# Altium PCB Target Control System Front Panel.PcbDoc
Units mm, origin at the board's own origin, x right, y up, seen from the top; angles counter-clockwise.
Board outline 254 x 161.7 mm, 2 copper layers (Top Layer, Bottom Layer), stack 1.569 mm thick; 8 components, 108 nets, 8 pads, 0 vias.
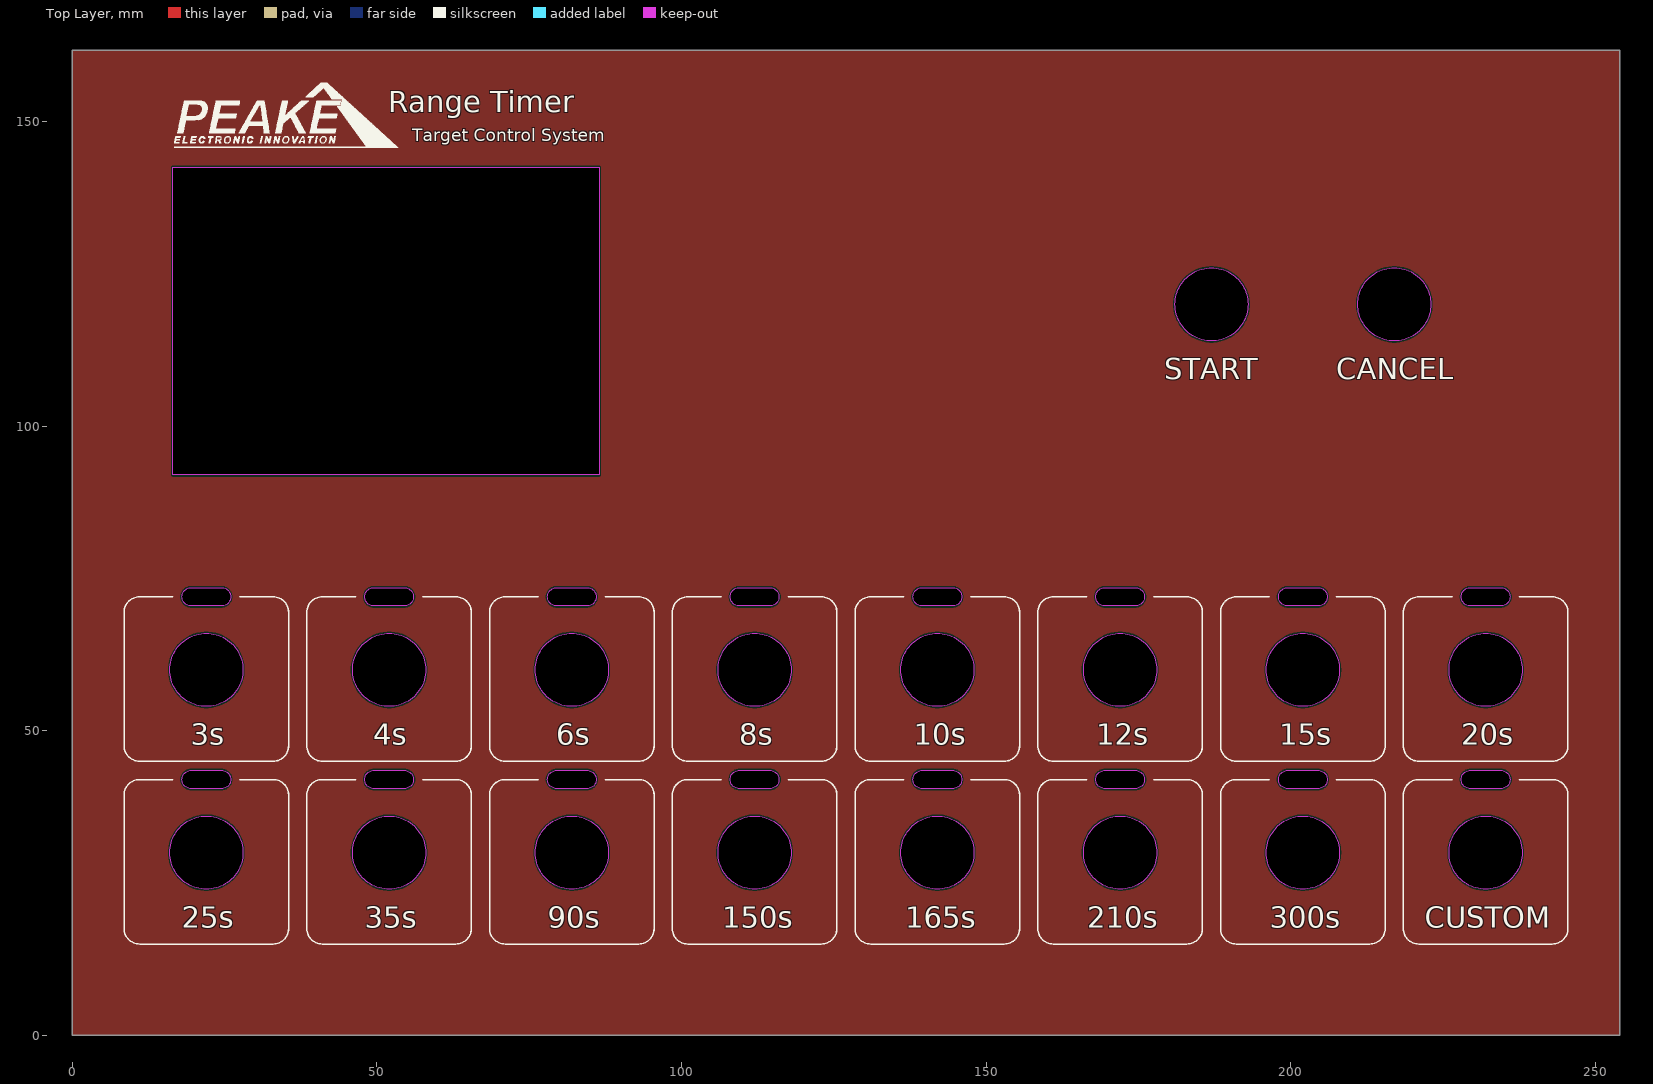
[diagram p0: Top Layer view]
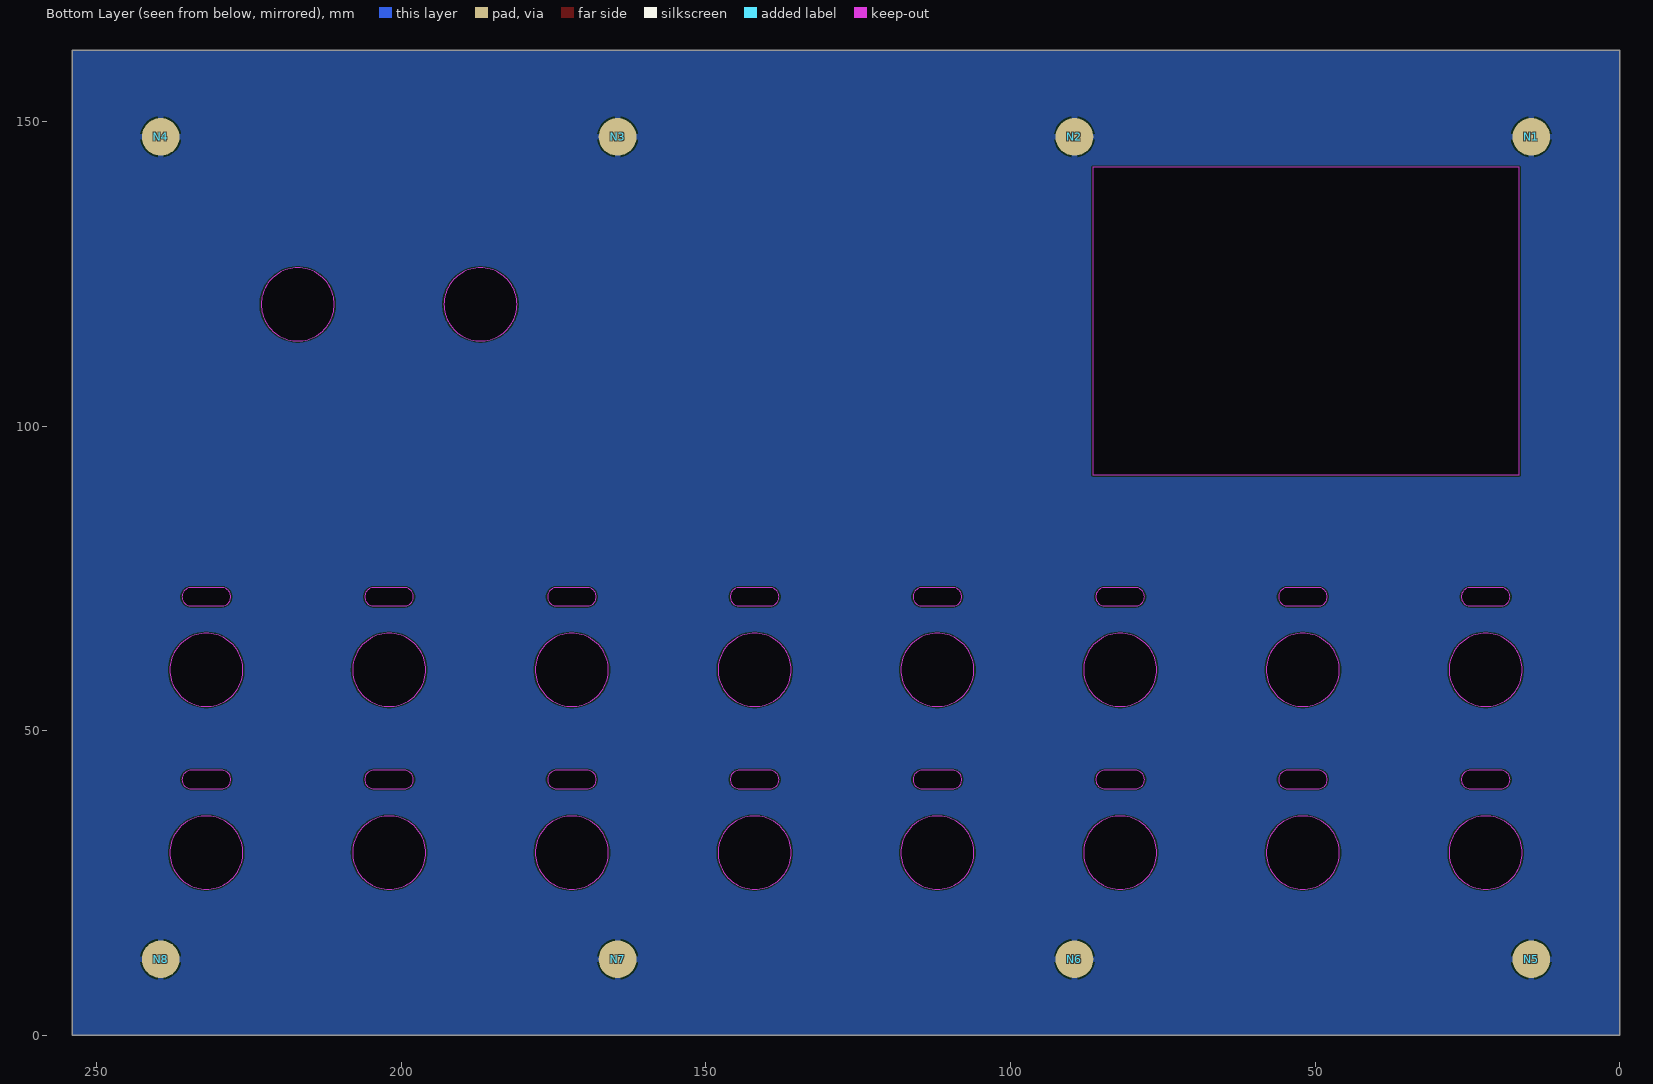
[diagram p1: Bottom Layer view, seen from below]

## Layer stack, top to bottom
Top Solder: solder mask 0.0254, SM-001, Dk 4
Top Layer: signal copper 0.035
Dielectric 1: core 1.4986, Core-043, Dk 4.3
Bottom Layer: signal copper 0.035
Bottom Solder: solder mask 0.0254, SM-001, Dk 4

## Board outline
0.006,0.006 254.006,0.006 254.006,161.706 0.006,161.706
cut-out: 211,120 cw(c217,120) 217,126 cw(c217,120) 223,120 cw(c217,120) 217,114 cw(c217,120)
cut-out: 181,120 cw(c187,120) 187,126 cw(c187,120) 193,120 cw(c187,120) 187,114 cw(c187,120)
cut-out: 196,30 cw(c202,30) 202,36 cw(c202,30) 208,30 cw(c202,30) 202,24 cw(c202,30)
cut-out: 199.5,40.5 cw(c199.5,42) 198,42 cw(c199.5,42) 199.5,43.5 204.5,43.5 cw(c204.5,42) 206,42 cw(c204.5,42) 204.5,40.5
cut-out: 199.5,70.5 cw(c199.5,72) 198,72 cw(c199.5,72) 199.5,73.5 204.5,73.5 cw(c204.5,72) 206,72 cw(c204.5,72) 204.5,70.5
cut-out: 196,60 cw(c202,60) 202,66 cw(c202,60) 208,60 cw(c202,60) 202,54 cw(c202,60)
cut-out: 229.5,40.5 cw(c229.5,42) 228,42 cw(c229.5,42) 229.5,43.5 234.5,43.5 cw(c234.5,42) 236,42 cw(c234.5,42) 234.5,40.5
cut-out: 226,30 cw(c232,30) 232,36 cw(c232,30) 238,30 cw(c232,30) 232,24 cw(c232,30)
cut-out: 229.5,70.5 cw(c229.5,72) 228,72 cw(c229.5,72) 229.5,73.5 234.5,73.5 cw(c234.5,72) 236,72 cw(c234.5,72) 234.5,70.5
cut-out: 226,60 cw(c232,60) 232,66 cw(c232,60) 238,60 cw(c232,60) 232,54 cw(c232,60)
cut-out: 136,30 cw(c142,30) 142,36 cw(c142,30) 148,30 cw(c142,30) 142,24 cw(c142,30)
cut-out: 139.5,40.5 cw(c139.5,42) 138,42 cw(c139.5,42) 139.5,43.5 144.5,43.5 cw(c144.5,42) 146,42 cw(c144.5,42) 144.5,40.5
cut-out: 139.5,70.5 cw(c139.5,72) 138,72 cw(c139.5,72) 139.5,73.5 144.5,73.5 cw(c144.5,72) 146,72 cw(c144.5,72) 144.5,70.5
cut-out: 136,60 cw(c142,60) 142,66 cw(c142,60) 148,60 cw(c142,60) 142,54 cw(c142,60)
cut-out: 169.5,40.5 cw(c169.5,42) 168,42 cw(c169.5,42) 169.5,43.5 174.5,43.5 cw(c174.5,42) 176,42 cw(c174.5,42) 174.5,40.5
cut-out: 166,30 cw(c172,30) 172,36 cw(c172,30) 178,30 cw(c172,30) 172,24 cw(c172,30)
cut-out: 169.5,70.5 cw(c169.5,72) 168,72 cw(c169.5,72) 169.5,73.5 174.5,73.5 cw(c174.5,72) 176,72 cw(c174.5,72) 174.5,70.5
cut-out: 166,60 cw(c172,60) 172,66 cw(c172,60) 178,60 cw(c172,60) 172,54 cw(c172,60)
cut-out: 76,30 cw(c82,30) 82,36 cw(c82,30) 88,30 cw(c82,30) 82,24 cw(c82,30)
cut-out: 79.5,40.5 cw(c79.5,42) 78,42 cw(c79.5,42) 79.5,43.5 84.5,43.5 cw(c84.5,42) 86,42 cw(c84.5,42) 84.5,40.5
cut-out: 79.5,70.5 cw(c79.5,72) 78,72 cw(c79.5,72) 79.5,73.5 84.5,73.5 cw(c84.5,72) 86,72 cw(c84.5,72) 84.5,70.5
cut-out: 76,60 cw(c82,60) 82,66 cw(c82,60) 88,60 cw(c82,60) 82,54 cw(c82,60)
cut-out: 109.5,40.5 cw(c109.5,42) 108,42 cw(c109.5,42) 109.5,43.5 114.5,43.5 cw(c114.5,42) 116,42 cw(c114.5,42) 114.5,40.5
cut-out: 106,30 cw(c112,30) 112,36 cw(c112,30) 118,30 cw(c112,30) 112,24 cw(c112,30)
cut-out: 109.5,70.5 cw(c109.5,72) 108,72 cw(c109.5,72) 109.5,73.5 114.5,73.5 cw(c114.5,72) 116,72 cw(c114.5,72) 114.5,70.5
cut-out: 106,60 cw(c112,60) 112,66 cw(c112,60) 118,60 cw(c112,60) 112,54 cw(c112,60)
cut-out: 46,60 cw(c52,60) 52,66 cw(c52,60) 58,60 cw(c52,60) 52,54 cw(c52,60)
cut-out: 49.5,70.5 cw(c49.5,72) 48,72 cw(c49.5,72) 49.5,73.5 54.5,73.5 cw(c54.5,72) 56,72 cw(c54.5,72) 54.5,70.5
cut-out: 46,30 cw(c52,30) 52,36 cw(c52,30) 58,30 cw(c52,30) 52,24 cw(c52,30)
cut-out: 49.5,40.5 cw(c49.5,42) 48,42 cw(c49.5,42) 49.5,43.5 54.5,43.5 cw(c54.5,42) 56,42 cw(c54.5,42) 54.5,40.5
cut-out: 16,60 cw(c22,60) 22,66 cw(c22,60) 28,60 cw(c22,60) 22,54 cw(c22,60)
cut-out: 19.5,70.5 cw(c19.5,72) 18,72 cw(c19.5,72) 19.5,73.5 24.5,73.5 cw(c24.5,72) 26,72 cw(c24.5,72) 24.5,70.5
cut-out: 19.5,40.5 cw(c19.5,42) 18,42 cw(c19.5,42) 19.5,43.5 24.5,43.5 cw(c24.5,42) 26,42 cw(c24.5,42) 24.5,40.5
cut-out: 16,30 cw(c22,30) 22,36 cw(c22,30) 28,30 cw(c22,30) 22,24 cw(c22,30)
cut-out: 16.5,142.5 86.5,142.5 86.5,92 16.5,92

## Design rules (kind name [scope] priority, off if disabled: settings)
AssemblyTestPointUsage AssemblyTestPointUsage_1 [All] p2:
AssemblyTestpoint AssemblyTestpoint_1 [All] p2: testpointundercomponent=TRUE minsize=1.016 maxsize=2.54 preferedsize=1.524 minholesize=0 maxholesize=1.016 preferedholesize=0.813 testpointgrid=0.025 usegrid=TRUE gridtolerance=0 allowsidetop=TRUE allowsidebottom=TRUE
Clearance [All] p1: gap=0.254 ignorepadtopadclearanceinfootprint=FALSE except(0: Arc-Hole Track-Hole SMDPad-Hole THPad-Hole Via-Hole Fill-Hole Poly-Hole Region-Hole Text-Hole)
Clearance Clearance_1 [All] p2: gap=0.254 ignorepadtopadclearanceinfootprint=FALSE except(0: Arc-Hole Track-Hole SMDPad-Hole THPad-Hole Via-Hole Fill-Hole Poly-Hole Region-Hole Text-Hole)
ComponentClearance ComponentClearance_1 [All] p2: gap=0.254 collisioncheckmode=3 verticalgap=0.254 showdistances=FALSE
DiffPairsRouting [All] p1: maxlimit=0.254 minlimit=0.254 mostfreqgap=0.254 toplayer_minwidth=0.381 toplayer_maxwidth=0.381 toplayer_prefwidth=0.381 bottomlayer_minwidth=0.381 bottomlayer_maxwidth=0.381 bottomlayer_prefwidth=0.381 maxuncoupledlength=12.7
DiffPairsRouting DiffPairsRouting_1 [All] p2: maxlimit=0.254 minlimit=0.254 mostfreqgap=0.254 toplayer_minwidth=0.381 toplayer_maxwidth=0.381 toplayer_prefwidth=0.381 bottomlayer_minwidth=0.381 bottomlayer_maxwidth=0.381 bottomlayer_prefwidth=0.381 maxuncoupledlength=12.7
FabricationTestPointUsage FabricationTestPointUsage_1 [All] p2: valid=0 allowmultiple=FALSE
FabricationTestpoint FabricationTestpoint_1 [All] p2: side=3 testpointundercomponent=TRUE minsize=1.016 maxsize=2.54 preferedsize=1.524 minholesize=0 maxholesize=1.016 preferedholesize=0.813 testpointgrid=0.025 allowsidetop=TRUE allowsidebottom=TRUE usegrid=TRUE gridtolerance=0
FanoutControl Fanout_LCC [IsLCC] p1: bgadir=Out bgaviamode=Centered fanoutstyle=Auto fanoutdirection=Alternating viagrid=0.025 // Fanout_LCC (Default Rule)
FanoutControl Fanout_BGA [IsBGA] p2: bgadir=Out bgaviamode=Centered fanoutstyle=Auto fanoutdirection=Alternating viagrid=0.025 // Fanout_BGA (Default Rule)
FanoutControl Fanout_Default [All] p4: bgadir=Out bgaviamode=Centered fanoutstyle=Auto fanoutdirection=Alternating viagrid=0.025 // Fanout_Default (Default Rule)
FanoutControl Fanout_Small [(CompPinCount < 5)] p5: bgadir=Out bgaviamode=Centered fanoutstyle=Auto fanoutdirection=OutThenIn viagrid=0.025 // Fanout_Small (Default Rule)
FanoutControl Fanout_BGA_1 [IsBGA] p6: bgadir=Out bgaviamode=Centered fanoutstyle=Auto fanoutdirection=Alternating viagrid=0.025 // Fanout_BGA (Default Rule)
FanoutControl Fanout_LCC_1 [IsLCC] p7: bgadir=Out bgaviamode=Centered fanoutstyle=Auto fanoutdirection=Alternating viagrid=0.025 // Fanout_LCC (Default Rule)
FanoutControl Fanout_SOIC_1 [IsSOIC] p8: bgadir=Out bgaviamode=Centered fanoutstyle=Auto fanoutdirection=Alternating viagrid=0.025 // Fanout_SOIC (Default Rule)
FanoutControl Fanout_Small_1 [(CompPinCount < 5)] p9: bgadir=Out bgaviamode=Centered fanoutstyle=Auto fanoutdirection=OutThenIn viagrid=0.025 // Fanout_Small (Default Rule)
FanoutControl Fanout_Default_1 [All] p10: bgadir=Out bgaviamode=Centered fanoutstyle=Auto fanoutdirection=Alternating viagrid=0.025 // Fanout_Default (Default Rule)
Height Height_1 [All] p2: minheight=0 maxheight=25.4 prefheight=12.7
HoleSize HoleSize_1 [All] p2: absolutevalues=TRUE maxlimit=2.54 minlimit=0.025 maxpercent=80.000 minpercent=20.000
HoleToHoleClearance HoleToHoleClearance_1 [All] p2: gap=0.254 allowstackedmicrovias=TRUE
LayerPairs LayerPairs_1 [All] p2: enforce=TRUE
MinimumSolderMaskSliver MinimumSolderMaskSliver_1 [All] p2: minsoldermaskwidth=0.254
NetAntennae NetAntennae_1 [All] p2: netantennaetolerance=0
PasteMaskExpansion PasteMaskExpansion_1 [All] p2: expansion=0
PlaneClearance PlaneClearance_1 [All] p2: clearance=0.508
PlaneConnect PlaneConnect_1 [All] p2: planeconnectstyle=Relief reliefexpansion=0.508 reliefentries=4 reliefconductorwidth=0.254 reliefairgap=0.254
PolygonConnect [All] p1: connectstyle=Relief reliefconductorwidth=0.254 reliefentries=4 polygonreliefangle="90 Angle" airgapwidth=0.254
PolygonConnect PolygonConnect_1 [All] p2: connectstyle=Relief reliefconductorwidth=1 reliefentries=4 polygonreliefangle="90 Angle" airgapwidth=0.254
RoutingCorners RoutingCorners_1 [All] p2: cornerstyle=45-Degree minsetback=2.54 maxsetback=2.54
RoutingLayers RoutingLayers_1 [All] p2: top layer_v5=TRUE bottom layer_v5=TRUE
RoutingPriority RoutingPriority_1 [All] p2: routingpriority=0
RoutingTopology RoutingTopology_1 [All] p2: topology=Shortest
RoutingVias [All] p1: holewidth=0.711 width=1.27 viastyle="Through Hole" minholewidth=0.711 minwidth=1.27 maxholewidth=0.711 maxwidth=1.27
RoutingVias RoutingVias_1 [All] p2: holewidth=0.711 width=1.27 viastyle="Through Hole" minholewidth=0.711 minwidth=1.27 maxholewidth=0.711 maxwidth=1.27
ShortCircuit ShortCircuit_1 [All] p2: allowed=FALSE
SilkToBoardRegionClearance SilkToBoardRegionClearance_1 [All] p2:
SilkToSilkClearance SilkToSilkClearance_1 [All] p2: silktosilkclearance=0.254
SilkToSolderMaskClearance SilkToSolderMaskClearance_1 [IsPad] p2: minsilkscreentomaskgap=0.254 clearancetoexposedcopper=TRUE
SolderMaskExpansion [All] p1: expansion=0.102 istentingtop=FALSE
SolderMaskExpansion SolderMaskExpansion_1 [All] p2: expansion=0.102 istentingtop=FALSE
UnRoutedNet UnRoutedNet_1 [All] p2:
UnpouredPolygon UnpouredPolygon_1 [All] p2 off:
Width [All] p1: maxlimit=0.254 minlimit=0.254 preferedwidth=0.254
Width Width_1 [All] p2: maxlimit=0.254 minlimit=0.254 preferedwidth=0.254
25 further rules are at their usual default settings.

## Classes and differential pairs
differential pair USB_D: +USB_D_P -USB_D_N

## Components (designator, comment, footprint, x,y, rotation, side; value= is the part's Value field where it differs from the comment)
N1 "PCB Nut" "PCB Nut M3 SMD" 14.5,147.5 r180 bottom
N2 "PCB Nut" "PCB Nut M3 SMD" 89.5,147.5 r180 bottom
N3 "PCB Nut" "PCB Nut M3 SMD" 164.5,147.5 r180 bottom
N4 "PCB Nut" "PCB Nut M3 SMD" 239.5,147.5 r180 bottom
N5 "PCB Nut" "PCB Nut M3 SMD" 14.5,12.5 r180 bottom
N6 "PCB Nut" "PCB Nut M3 SMD" 89.5,12.5 r180 bottom
N7 "PCB Nut" "PCB Nut M3 SMD" 164.5,12.5 r180 bottom
N8 "PCB Nut" "PCB Nut M3 SMD" 239.5,12.5 r180 bottom

## Footprints (in the part's own frame and the unit in brackets; to place one, negate y for a bottom-side part, rotate by r counter-clockwise, add the part's x,y. Pads: shape width x height; smd on the part's side, far side on the other; paste and mask are expansions set on the pad)
"PCB Nut M3 SMD" [mm]
  round 6.2 smd: 1(0,0)
  body extent -2.78,-2.78 2.78,2.78, height 9.53

## Part data
N1 N2 N3 N4 N5 N6 N7 N8: library part CMP-00059-2, "SMD or through hole soldered PCB nut"

## Nets (pads, with @x,y where several pads share a name; then routed paths per layer and width w, separated by ;. In a path a pad name is that pad's centre, name@x,y a point inside that pad or via, vN(x,y) a via of type N, cw(c..) or ccw(c..) an arc to the next point about the centre after c; other vN are vias at no path point)
+3.3: 
+5: 
+24: 
CANCEL: 
CUSTOM: 
D0: 
D4: 
D7: 
D28: 
D53: 
D54: 
D55: 
D_GND: 
GATE_OUT_1: 
GATE_OUT_2: 
GATE_OUT_3: 
GND: N1.1 N2.1 N3.1 N4.1 N5.1 N6.1 N7.1 N8.1
IN_1: 
IN_2: 
IN_3: 
IN_4: 
IN_5: 
IN_6: 
IN_7: 
IN_8: 
IN_9: 
IN_10: 
IN_11: 
IN_12: 
IN_13: 
IN_14: 
IN_15: 
LED_D_OUT: 
LED_DAT: 
MISO: 
MISO_1: 
MOSI: 
MOSI_1: 
NetBT1_+: 
NetC1_1: 
NetC1_2: 
NetC2_2: 
NetC7_1: 
NetC8_1: 
NetC12_2: 
NetC15_2: 
NetC16_2: 
NetC20_1: 
NetC25_1: 
NetC34_1: 
NetC36_1: 
NetC41_1: 
NetC48_1: 
NetF1_1: 
NetQ1_G: 
NetQ2_2: 
NetQ3_G: 
NetQ4_2: 
NetQ5_1: 
NetQ5_2: 
NetQ6_G: 
NetQ7_2: 
NetR1_2: 
NetR3_2: 
NetR4_1: 
NetR27_1: 
NetR28_1: 
NetR30_1: 
NetR32_1: 
NetTFT1_15: 
NetU5_2: 
NetU6_2: 
NetU7_2: 
NetU8_2: 
NetU9_2: 
NetU10_2: 
NetU11_2: 
NetU12_2: 
NetU14_2: 
NetU15_2: 
NetU16_2: 
NetU17_2: 
NetU18_2: 
NetU19_2: 
NetU20_2: 
NRF_CE: 
NRF_CS: 
NRF_IRQ: 
OUT_1: 
OUT_2: 
OUT_3: 
RESET: 
RTC_EI: 
SCK: 
SCK_1: 
SCL: 
SDA: 
START: 
SWCLK: 
SWDIO: 
TFT_CS: 
TFT_DC: 
TFT_LED_PWM: 
TFT_RST: 
TFT_T_IRQ: 
USB_D_N: 
USB_D_P: 
Vbus: 

## Polygon pours and split planes (outlines as drawn)
GND on Top Layer "Top Layer-GND" (solid, pour order 0): 0,0 254,0 254,161.706 0,161.706
GND on Bottom Layer "Bottom Layer-GND" (solid, pour order 1): 0,0 254,0 254,161.706 0,161.706

## Silkscreen, mask and mechanical layers (free items; w line width, h text height)
Top Overlay:
  drawing of 218 lines, arcs and shapes, not listed
  text "Range Timer" at 51.837,150.391 h6
  text "Target Control System" at 55.816,146.02 h3.5
  text "START" at 179.219,106.55 h6
  text "CANCEL" at 207.471,106.55 h6
  text "3s" at 19.43,46.55 h6
  text "4s" at 49.399,46.55 h6
  text "6s" at 79.444,46.55 h6
  text "8s" at 109.442,46.55 h6
  text "10s" at 138.111,46.55 h6
  text "12s" at 168.111,46.55 h6
  text "15s" at 198.111,46.55 h6
  text "20s" at 227.993,46.55 h6
  text "25s" at 17.993,16.55 h6
  text "35s" at 48.011,16.55 h6
  text "90s" at 78.009,16.55 h6
  text "150s" at 106.693,16.55 h6
  text "165s" at 136.693,16.55 h6
  text "210s" at 166.574,16.55 h6
  text "300s" at 196.593,16.55 h6
  text "CUSTOM" at 221.967,16.55 h6
Outline:
  the board outline again, w0.013